# Altium PCB XPCAM_1V4.PCBDOC (part 1 of 2)
Units mil, origin at the board's own origin, x right, y up, seen from the top; angles counter-clockwise.
Board outline 2183.56 x 1446.93 mil, 6 copper layers (Top Layer, Mid-Layer 1, Mid-Layer 2, Mid-Layer 3, Mid-Layer 4, Bottom Layer); 49 components, 32 nets, 261 pads, 143 vias.
Unrouted connection lines stored in the file: 46.
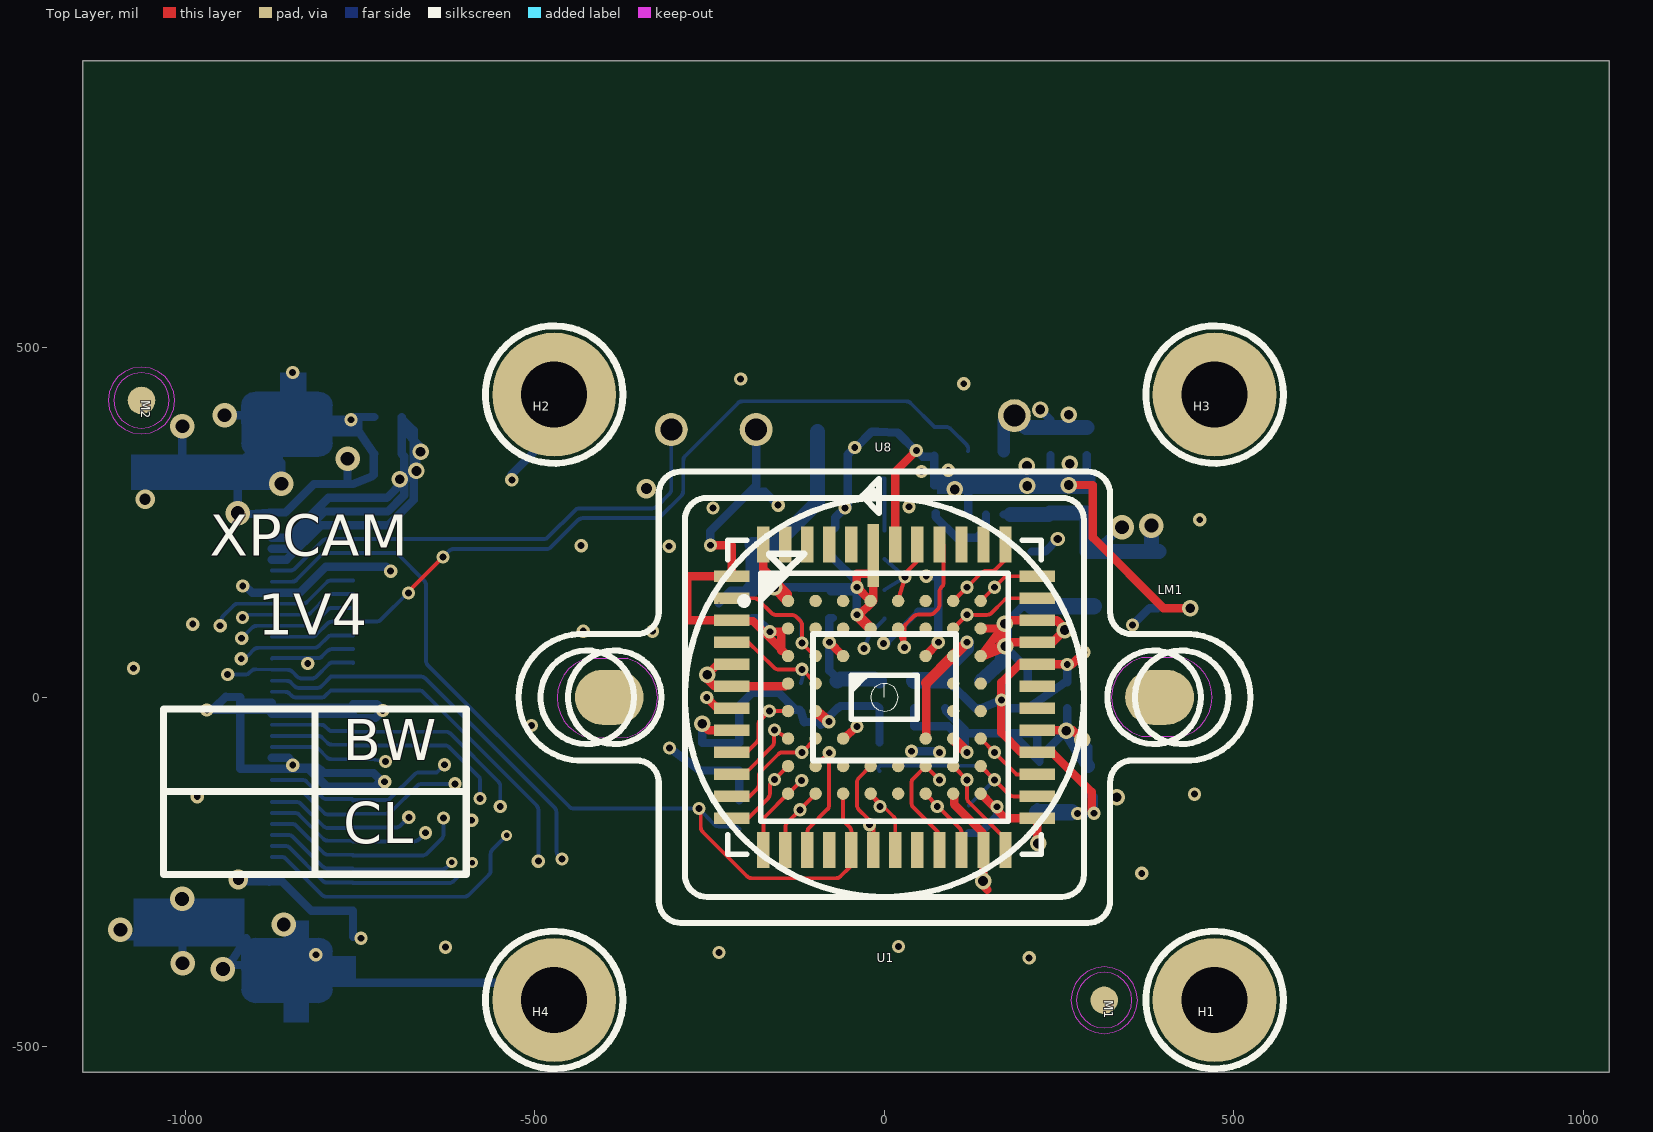
[diagram p0: Top Layer view]
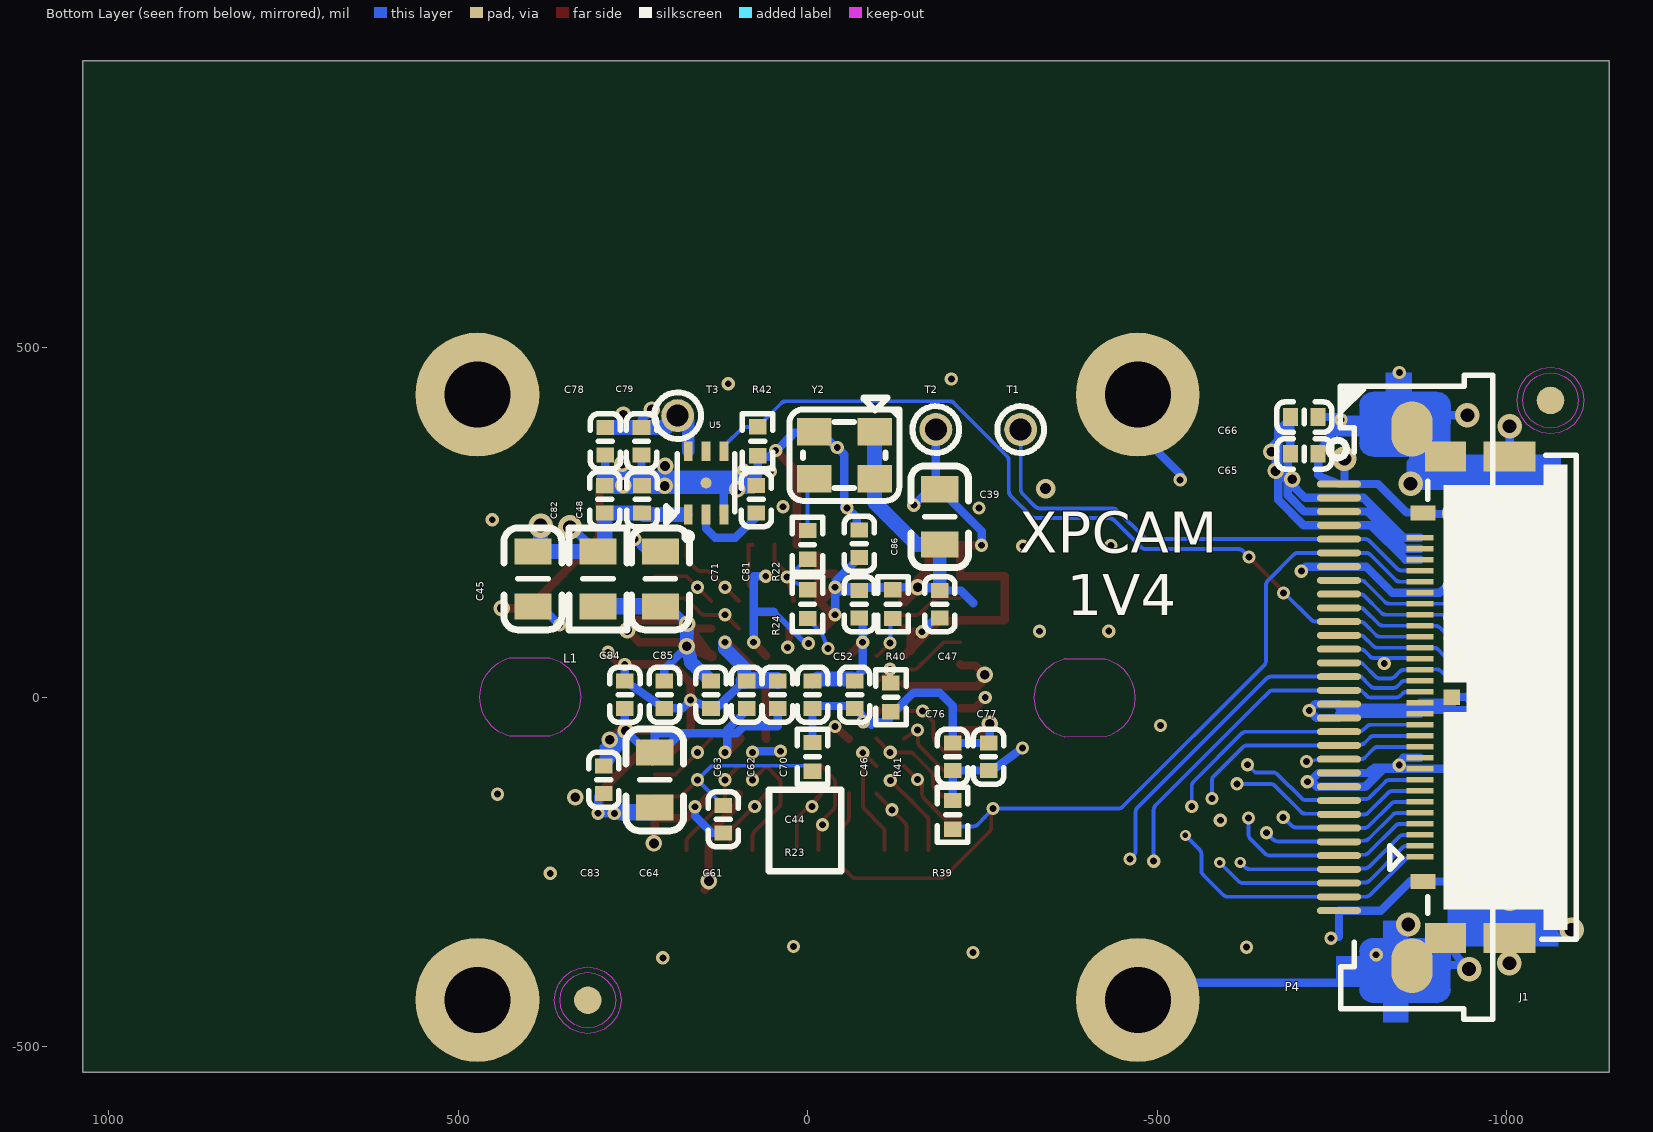
[diagram p1: Bottom Layer view, seen from below]
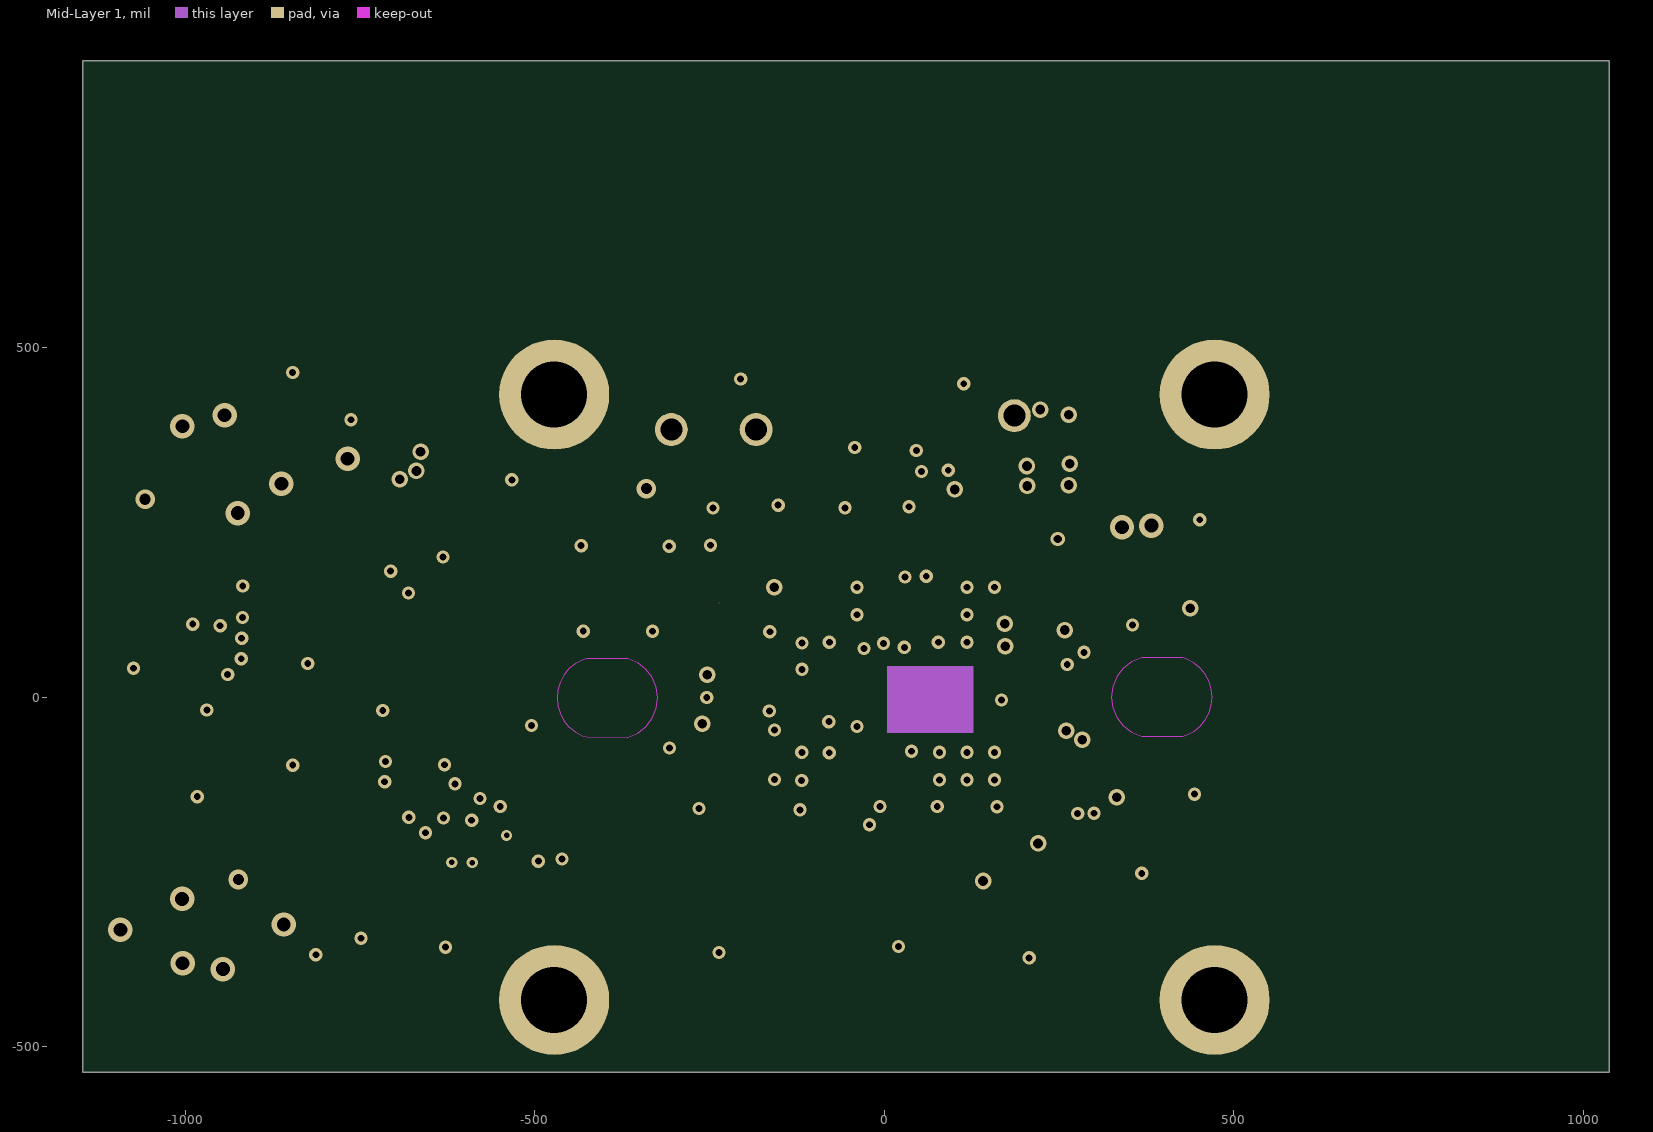
[diagram p2: Mid-Layer 1]
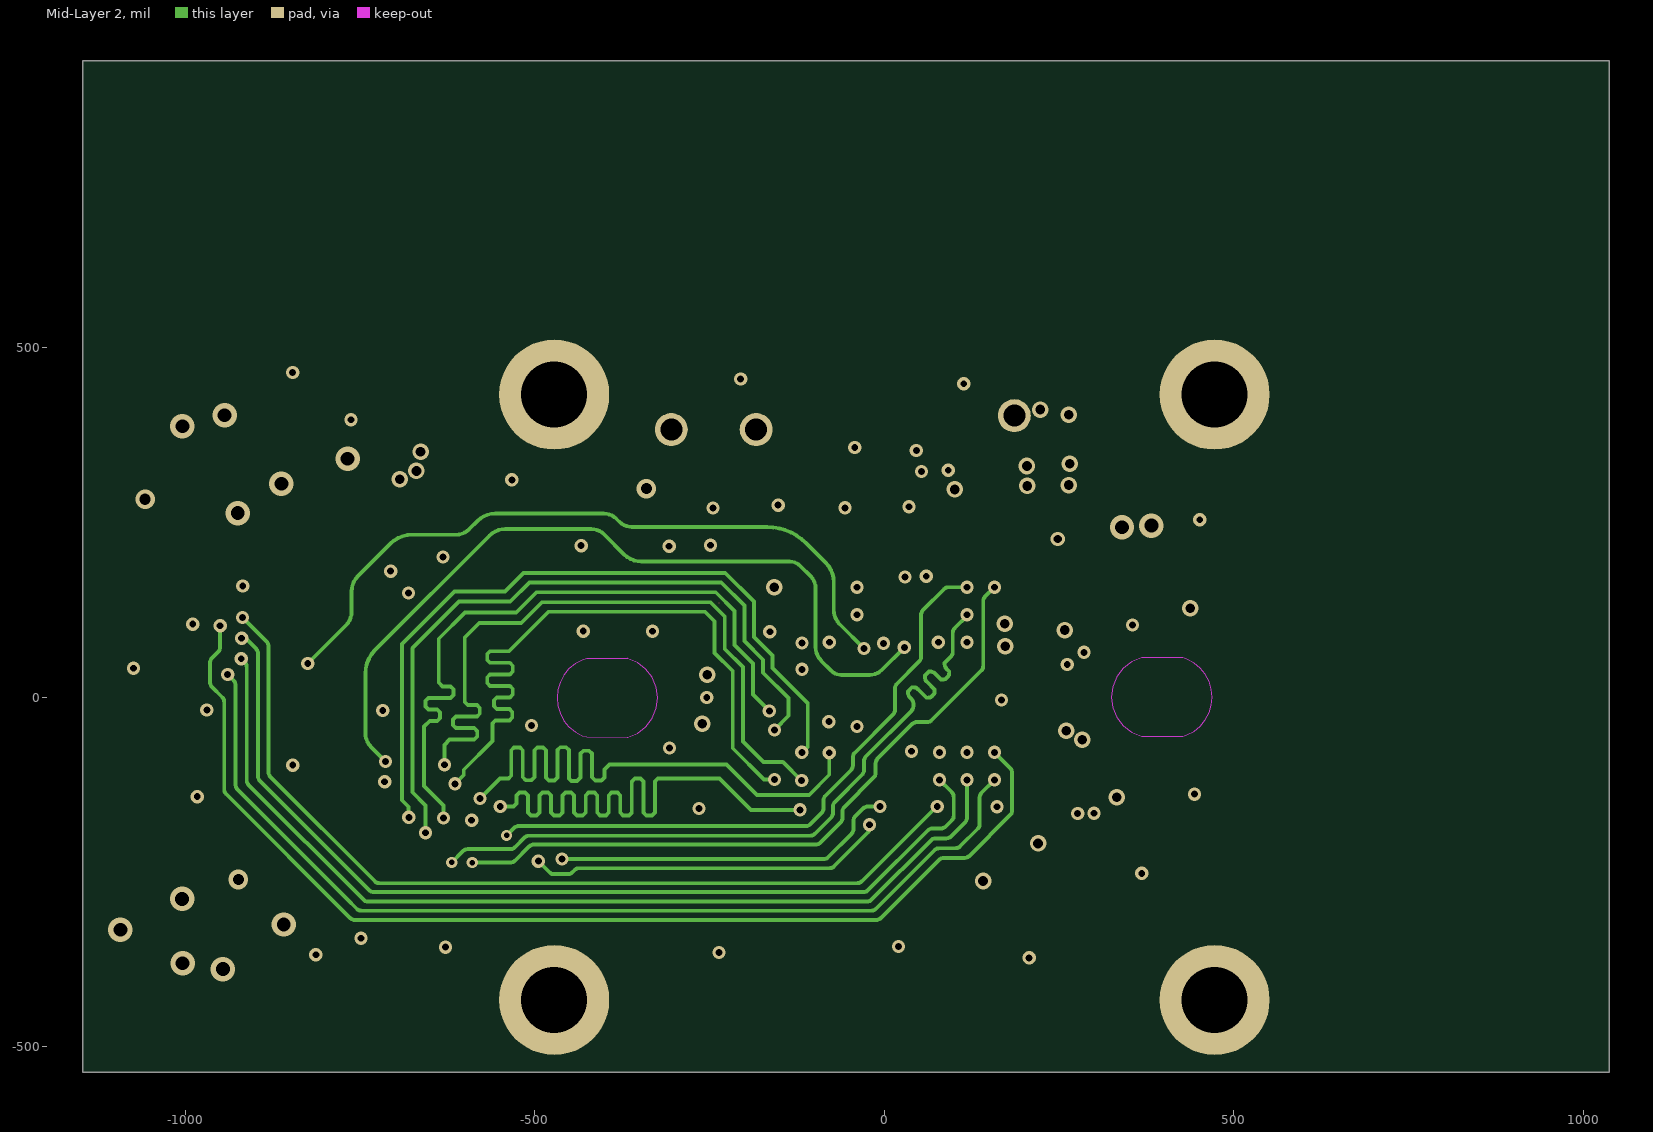
[diagram p3: Mid-Layer 2]
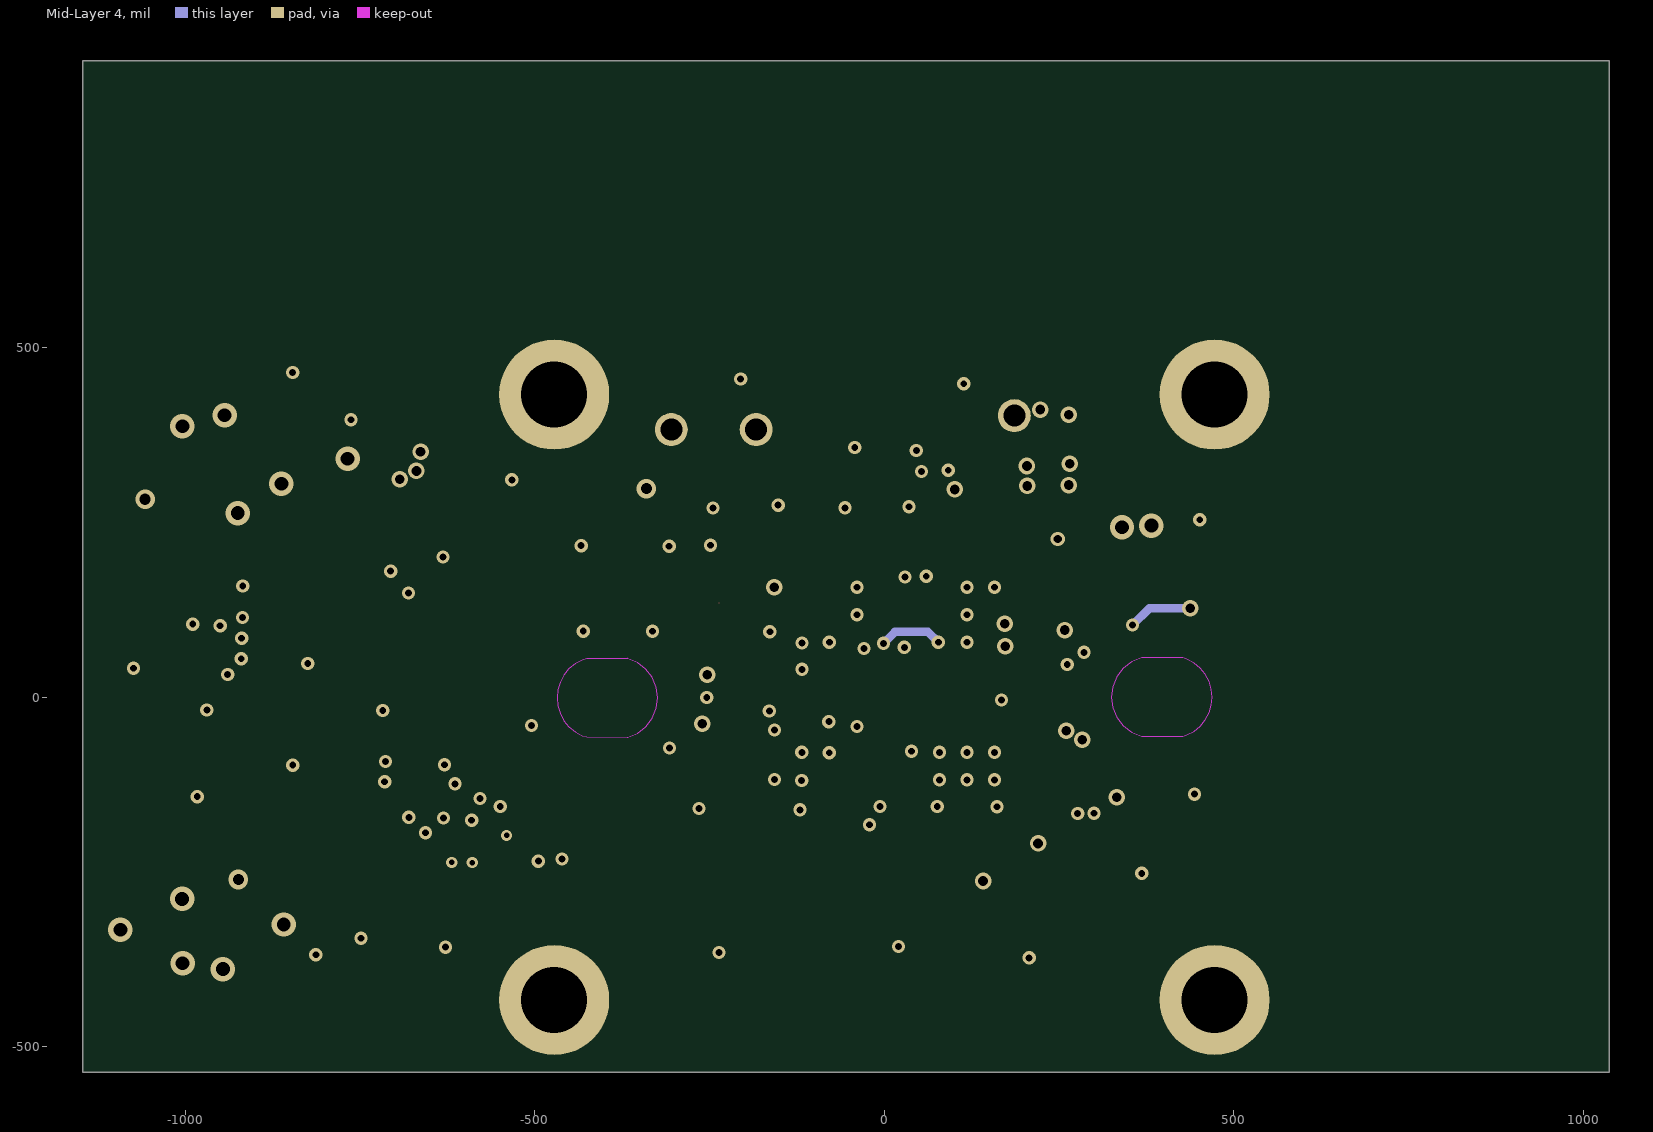
[diagram p4: Mid-Layer 4]

## Layer stack, top to bottom
Top Layer: signal copper 1.4
Dielectric: dielectric 12.6, FR-4, Dk 4.8
Mid-Layer 1: signal copper 1.4
Dielectric: dielectric 12.6, FR-4, Dk 4.8
Mid-Layer 2: signal copper 1.4
Dielectric: dielectric 12.6, FR-4, Dk 4.8
Mid-Layer 3: signal copper 1.4
Dielectric: dielectric 12.6, FR-4, Dk 4.8
Mid-Layer 4: signal copper 1.4
Dielectric: dielectric 12.6, FR-4, Dk 4.8
Bottom Layer: signal copper 1.4

## Board outline
-1146.73,-536.42 1036.82,-536.42 1036.82,910.52 -1146.73,910.52

## Design rules (kind name [scope] priority, off if disabled: settings)
Clearance [All] p1: gap=10
PlaneConnect "Power Plane Connect Style - pads with no thermal" [(Name='J1-31') Or (Name='J1-32') Or (Name='M1-1') Or (Name='M2-1')] p1: planeconnectstyle=NoConnect reliefexpansion=20 reliefentries=4 reliefconductorwidth=10 reliefairgap=10 // PAD - No Thermal Connect Rule
PlaneConnect "Power Plane Connect Style - from global settings" [All] p2: planeconnectstyle=Relief reliefexpansion=20 reliefentries=2 reliefconductorwidth=11.81 reliefairgap=10
PolygonConnect [All] p1: connectstyle=Relief reliefconductorwidth=10 reliefentries=4 polygonreliefangle="90 Angle"
RoutingVias [All] p1: holewidth=28 width=50 viastyle="Through Hole" minholewidth=28 minwidth=50 maxholewidth=28 maxwidth=50
SilkscreenOverComponentPads [All] p1: minsilkscreentomaskgap=10
SolderMaskExpansion "Solder Mask Expansion from CAM settings" [All] p1: expansion=2
Width [All] p1: maxlimit=10 minlimit=10 preferedwidth=10
26 further rules are at their usual default settings.

## Components (designator, comment, footprint, x,y, rotation, side; value= is the part's Value field where it differs from the comment)
C39 "10uF" 0805C -189.13,258.19 r270 bottom
C44 "4.7uF" 0402C_L -7.1,3.87 r270 bottom
C45 "10uF" 0805C 392.98,169.29 r90 bottom
C46 "0.1uF" 0402C_L -67.43,3.87 r270 bottom
C47 "0.1uF" 0402C_L -189.13,133.2 r90 bottom
C48 "0.1uF" 0402C_L 236.86,283.34 r270 bottom
C52 "4.7uF" 0402C_L -74,133.2 r90 bottom
C61 "0.1uF" 0402C_L 120.61,-174.53 r90 bottom
C62 "0.1uF" 0402C_L 87.28,3.82 r270 bottom
C63 "4.7uF" 0402C_L 138.12,3.82 r90 bottom
C64 "10uF" 0805C 218.76,-118.11 r90 bottom
C65 "4.7uF" 0402C_L -710.43,348.23 r0 bottom
C66 "0.1uF" 0402C_L -710.43,400.96 r0 bottom
C70 "4.7uF" 0402C_L 42.88,3.82 r270 bottom
C71 "10uF" 0805C 210.63,169.29 r270 bottom
C76 "4.7u" 0402C_L -207.5,-85.1 r270 bottom
C77 "0.1uF" 0402C_L -258.93,-85.1 r90 bottom
C78 "0.1uF" 0402C_L 289.43,366.31 r90 bottom
C79 "1uF" 0402C_L 237.68,366.31 r90 bottom
C81 "0.01uF" 0402C_L 73.34,283.34 r270 bottom
C82 "0.1uF" 0402C_L 290.26,283.34 r270 bottom
C83 "0.1uF" 0402C_L 291.49,-118.11 r90 bottom
C84 "0.01uF" 0402C_L 261.3,3.82 r270 bottom
C85 "1nF" 0402C_L 204.82,3.82 r90 bottom
C86 "0.1uF" 0402C_L -74,219.88 r270 bottom
H1 "CON1" PAD_M3_D350_450 472.44,-433.07 r0 top
H2 "CON1" PAD_M3_D350_450 -472.44,433.07 r0 top
H3 "CON1" PAD_M3_D350_450 472.44,433.07 r0 top
H4 "CON1" PAD_M3_D350_450 -472.44,-433.07 r0 top
J1 "20525-030E-02" HSA30_P40L196W42H10_20525 -939.38,0 r90 bottom
L1 "10uH" 0805R 299.83,169.29 r270 bottom
LM1 "CMT821_20" LEMS_P20_M12 0,0 r0 top
M1 "PAD_MARK_D1-2" PAD_MARK_D1-2 314.46,-433.37 r270 top
M2 "PAD_MARK_D1-2" PAD_MARK_D1-2 -1062.86,424.68 r270 top
P4 "Header_32" HS32A_FPC_P50L2350W480H210 -781.9,0 r90 bottom
R22 "0R" 0402R_L 0,218.21 r90 bottom
R23 "10K" 0402R_L -7.1,-85.1 r90 bottom
R24 "22R" 0402R_L 0,133.2 r270 bottom
R39 "10K" 0402R_L -207.5,-168.1 r90 bottom
R40 "10K" 0402R_L -122.1,133.2 r90 bottom
R41 "10K" 0402R_L -119.23,0.05 r270 bottom
R42 "10K" 0402R_L 71.48,366.31 r90 bottom
T1 "CON1" PAD_TP_D1.2 -304.94,383.03 r180 bottom
T2 "PAD_TP_D1.2" PAD_TP_D1.2 -183.44,383.03 r180 bottom
T3 "PAD_TP_D1.2" PAD_TP_D1.2 185.85,402.95 r180 bottom
U1 "MT9V024IA7XTM" IBGA52_8X8_P100L90W90H90R 0,0 r0 top
U5 "TPS73533" SON6_P65L21W21H8_DRV 145.26,306.77 r90 bottom
U8 "CLCC48_P80L114W114H23" CLCC48_P80L114W114H23 0,0 r0 top
Y2 "HSO531S_3225" XTAL_3225 -52.57,346.46 r0 bottom

## Footprints (in the part's own frame and the unit in brackets; to place one, negate y for a bottom-side part, rotate by r counter-clockwise, add the part's x,y. Pads: shape width x height; smd on the part's side, far side on the other; paste and mask are expansions set on the pad)
0402C_L [mm]
  rect 0.54x0.64 smd: 1(-0.5,0) 2(0.5,0)
  silkscreen extent -1,-0.55 1,0.55
0402R_L [mm]
  rect 0.56x0.64 smd: 1(-0.52,0) 2(0.52,0)
  silkscreen extent -1,-0.55 1,0.55
0805C [mm]
  rect 0.95x1.35 smd: 1(-1,0) 2(1,0)
  silkscreen extent -1.85,-1.05 1.85,1.05
0805R [mm]
  rect 0.95x1.35 smd: 1(-1,0) 2(1,0)
  silkscreen extent -1.85,-1.05 1.85,1.05
CLCC48_P80L114W114H23 [mm]
  rect 0.42x2.3 smd: 1(-0.4,5.15)
  rect 0.45x1.3 smd paste-0.015: 2(-1.2,5.55) 3(-2,5.55) 4(-2.8,5.55) 5(-3.6,5.55) 6(-4.4,5.55) 19(-4.4,-5.55) 20(-3.6,-5.55) 21(-2.8,-5.55) 22(-2,-5.55) 23(-1.2,-5.55) 24(-0.4,-5.55) 25(0.4,-5.55) 26(1.2,-5.55) 27(2,-5.55) 28(2.8,-5.55) 29(3.6,-5.55) 30(4.4,-5.55) 43(4.4,5.55) 44(3.6,5.55) 45(2.8,5.55) 46(2,5.55) 47(1.2,5.55) 48(0.4,5.55)
  rect 1.3x0.42 smd: 7(-5.55,4.4) 8(-5.55,3.6) 9(-5.55,2.8) 10(-5.55,2) 11(-5.55,1.2) 12(-5.55,0.4) 13(-5.55,-0.4) 14(-5.55,-1.2) 15(-5.55,-2) 16(-5.55,-2.8) 17(-5.55,-3.6) 18(-5.55,-4.4) 31(5.55,-4.4) 32(5.55,-3.6) 33(5.55,-2.8) 34(5.55,-2) 35(5.55,-1.2) 36(5.55,-0.4) 37(5.55,0.4) 38(5.55,1.2) 39(5.55,2) 40(5.55,2.8) 41(5.55,3.6) 42(5.55,4.4)
  silkscreen extent -5.7,-5.7 5.7,7.92
HS32A_FPC_P50L2350W480H210 [mm]
  oval 0.254x1.6 smd: 1(7.75,0.55) 2(7.25,0.55) 3(6.75,0.55) 4(6.25,0.55) 5(5.75,0.55) 6(5.25,0.55) 7(4.75,0.55) 8(4.25,0.55) 9(3.75,0.55) 10(3.25,0.55) 11(2.75,0.55) 12(2.25,0.55) 13(1.75,0.55) 14(1.25,0.55) 15(0.75,0.55) 16(0.25,0.55) 17(-0.25,0.55) 18(-0.75,0.55) 19(-1.25,0.55) 20(-1.75,0.55) 21(-2.25,0.55) 22(-2.75,0.55) 23(-3.25,0.55) 24(-3.75,0.55) 25(-4.25,0.55) 26(-4.75,0.55) 27(-5.25,0.55) 28(-5.75,0.55) 29(-6.25,0.55) 30(-6.75,0.55) 31(-7.25,0.55) 32(-7.75,0.55)
  oval 2x1.5 smd: 33(9.75,-2.1) 34(-9.75,-2.1)
  Top Layer region: 9.25,-0.19 9.055,-0.229 8.89,-0.34 8.779,-0.505 8.74,-0.7 8.75,-0.7 8.74,-3 8.779,-3.195 8.89,-3.36 9.055,-3.471 9.25,-3.51 9.25,-3.5 10.6,-3.51 10.795,-3.471 10.96,-3.36 11.071,-3.195 11.11,-3 11.1,-3 11.11,-0.7 11.071,-0.505 10.96,-0.34 10.795,-0.229 10.6,-0.19 10.6,-0.2 9.25,-0.2
  Top Layer region: -10.6,-0.19 -10.795,-0.229 -10.96,-0.34 -11.071,-0.505 -11.11,-0.7 -11.1,-0.7 -11.11,-3 -11.071,-3.195 -10.96,-3.36 -10.795,-3.471 -10.6,-3.51 -10.6,-3.5 -9.25,-3.51 -9.055,-3.471 -8.89,-3.36 -8.779,-3.195 -8.74,-3 -8.75,-3 -8.74,-0.7 -8.779,-0.505 -8.89,-0.34 -9.055,-0.229 -9.25,-0.19 -9.25,-0.2 -10.6,-0.2
  silkscreen extent -11.7,-5.04 11.7,0.92
HSA30_P40L196W42H10_20525 [mm]
  rect 0.2x0.98 smd: 1(-5.8,1.6) 2(-5.4,1.6) 3(-5,1.6) 4(-4.6,1.6) 5(-4.2,1.6) 6(-3.8,1.6) 7(-3.4,1.6) 8(-3,1.6) 9(-2.6,1.6) 10(-2.2,1.6) 11(-1.8,1.6) 12(-1.4,1.6) 13(-1,1.6) 14(-0.6,1.6) 15(-0.2,1.6) 16(0.2,1.6) 17(0.6,1.6) 18(1,1.6) 19(1.4,1.6) 20(1.8,1.6) 21(2.2,1.6) 22(2.6,1.6) 23(3,1.6) 24(3.4,1.6) 25(3.8,1.6) 26(4.2,1.6) 27(4.6,1.6) 28(5,1.6) 29(5.4,1.6) 30(5.8,1.6)
  round 0 all layers, no hole: 31(-7.45,0) 32(7.45,0)
  rect 1.1x1.5 smd: 33(-8.75,0.68) 34(8.75,0.68)
  rect 1.1x1.9 smd: 35(8.75,-1.65) 36(-8.75,-1.65)
  rect 0.55x0.9 smd: 37(-6.7,1.5) 38(6.7,1.5)
  rect 0.55x0.6 smd: 39(0,0.45)
  silkscreen extent -8.8,-4.07 8.8,2.7
IBGA52_8X8_P100L90W90H90R [mm]
  round 0.45 smd: A1(-3.5,3.5) A2(-2.5,3.5) A3(-1.5,3.5) A4(-0.5,3.5) A5(0.5,3.5) A6(1.5,3.5) A7(2.5,3.5) A8(3.5,3.5) B1(-3.5,2.5) B2(-2.5,2.5) B3(-1.5,2.5) B4(-0.5,2.5) B5(0.5,2.5) B6(1.5,2.5) B7(2.5,2.5) B8(3.5,2.5) C1(-3.5,1.5) C2(-2.5,1.5) C3(-1.5,1.5) C6(1.5,1.5) C7(2.5,1.5) C8(3.5,1.5) D1(-3.5,0.5) D2(-2.5,0.5) D7(2.5,0.5) D8(3.5,0.5) E1(-3.5,-0.5) E2(-2.5,-0.5) E7(2.5,-0.5) E8(3.5,-0.5) F1(-3.5,-1.5) F2(-2.5,-1.5) F3(-1.5,-1.5) F6(1.5,-1.5) F7(2.5,-1.5) F8(3.5,-1.5) G1(-3.5,-2.5) G2(-2.5,-2.5) G3(-1.5,-2.5) G4(-0.5,-2.5) G5(0.5,-2.5) G6(1.5,-2.5) G7(2.5,-2.5) G8(3.5,-2.5) H1(-3.5,-3.5) H2(-2.5,-3.5) H3(-1.5,-3.5) H4(-0.5,-3.5) H5(0.5,-3.5) H6(1.5,-3.5) H7(2.5,-3.5) H8(3.5,-3.5)
  silkscreen extent -5.22,-4.5 4.5,4.5
LEMS_P20_M12 [mm]
  oval 2.5x2 smd: 1(-10,0) 2(10,0)
  silkscreen extent -13.3,-8.2 13.3,8.2
PAD_M3_D350_450 [mm]
  round 4.5 / inner round 4 / far side round 4.5 hole 2.4 unplated: 1(0,0)
  silkscreen extent -2.5,-2.5 2.5,2.5
PAD_MARK_D1-2 [mm]
  round 1 / inner round 0 / far side round 1 all layers, no hole mask+0.5: 1(0,0)
  Top Layer keep-out region: 1.009,0 0.974,0.261 0.873,0.504 0.713,0.713 0.504,0.873 0.261,0.974 0,1.009 -0.261,0.974 -0.504,0.873 -0.713,0.713 -0.873,0.504 -0.974,0.261 -1.009,0 -0.974,-0.261 -0.873,-0.504 -0.713,-0.713 -0.504,-0.873 -0.261,-0.974 0,-1.009 0.261,-0.974 0.504,-0.873 0.713,-0.713 0.873,-0.504 0.974,-0.261 1.009,0
  Top Layer keep-out region: 1.21,0 1.169,0.313 1.048,0.605 0.856,0.856 0.605,1.048 0.313,1.169 0,1.21 -0.313,1.169 -0.605,1.048 -0.856,0.856 -1.048,0.605 -1.169,0.313 -1.21,0 -1.169,-0.313 -1.048,-0.605 -0.856,-0.856 -0.605,-1.048 -0.313,-1.169 0,-1.21 0.313,-1.169 0.605,-1.048 0.856,-0.856 1.048,-0.605 1.169,-0.313 1.21,0
  Bottom Layer keep-out region: 1.009,0 0.974,0.261 0.873,0.504 0.713,0.713 0.504,0.873 0.261,0.974 0,1.009 -0.261,0.974 -0.504,0.873 -0.713,0.713 -0.873,0.504 -0.974,0.261 -1.009,0 -0.974,-0.261 -0.873,-0.504 -0.713,-0.713 -0.504,-0.873 -0.261,-0.974 0,-1.009 0.261,-0.974 0.504,-0.873 0.713,-0.713 0.873,-0.504 0.974,-0.261 1.009,0
  Bottom Layer keep-out region: 1.21,0 1.169,0.313 1.048,0.605 0.856,0.856 0.605,1.048 0.313,1.169 0,1.21 -0.313,1.169 -0.605,1.048 -0.856,0.856 -1.048,0.605 -1.169,0.313 -1.21,0 -1.169,-0.313 -1.048,-0.605 -0.856,-0.856 -0.605,-1.048 -0.313,-1.169 0,-1.21 0.313,-1.169 0.605,-1.048 0.856,-0.856 1.048,-0.605 1.169,-0.313 1.21,0
PAD_TP_D1.2 [mm]
  round 1.2 hole 0.8: 1(0,0)
  silkscreen extent -0.85,-0.85 0.85,0.85
SON6_P65L21W21H8_DRV [mm]
  rect 0.72x0.32 smd: 1(-1.15,0.65) 2(-1.15,0) 3(-1.15,-0.65) 4(1.15,-0.65) 5(1.15,0) 6(1.15,0.65)
  round 0.4 smd: 7(0,0)
  Top Layer region: -0.4,0.6 -0.2,0.8 0.2,0.804 0.278,0.788 0.344,0.744 0.388,0.678 0.404,0.6 0.4,0.6 0.404,-0.6 0.388,-0.678 0.344,-0.744 0.278,-0.788 0.2,-0.804 0.2,-0.8 -0.2,-0.804 -0.278,-0.788 -0.344,-0.744 -0.388,-0.678 -0.404,-0.6 -0.4,-0.6 -0.4,0.6
  silkscreen extent -2.07,-1.05 1.05,1.45
XTAL_3225 [mm]
  rect 1.25x1 smd: 1(-1.1,-0.85) 2(1.1,-0.85) 3(1.1,0.85) 4(-1.1,0.85)
  silkscreen extent -2,-2.08 2,1.66

## Via types
v1: diameter 19, hole 9.84, Top Layer to Bottom Layer, 101 vias
v2: diameter 23.62, hole 13.78, Top Layer to Bottom Layer, 22 vias
v3: diameter 35, hole 19.68, Top Layer to Bottom Layer, 12 vias
v4: diameter 16, hole 7.87, Top Layer to Bottom Layer, 3 vias
v5: diameter 27.95, hole 15.75, Top Layer to Bottom Layer, 3 vias
v6: diameter 20.47, hole 11.81, Top Layer to Bottom Layer, 1 vias
v7: diameter 0, hole 0, Top Layer to Bottom Layer, 1 vias

## Nets (pads, with @x,y where several pads share a name; then routed paths per layer and width w, separated by ;. In a path a pad name is that pad's centre, name@x,y a point inside that pad or via, vN(x,y) a via of type N, cw(c..) or ccw(c..) an arc to the next point about the centre after c; other vN are vias at no path point)
5V0: C65.2 C66.2 C78.2 C79.2 J1.28 J1.29 J1.30 P4.2 P4.3 P4.4 T3.1 U5.6 | length 1264.6
  Bottom Layer w12: J1.28@-876.39,196.85 -855.27,196.85 -806.05,246.07 P4.4@-760.25,246.07 -709.89,246.07 -673.61,282.34 -673.61,381.99 -690.74,399.13 C66.2@-690.74,400.96 ; J1.29@-876.39,212.6 -854.22,212.6 -801.07,265.75 P4.3@-760.25,265.75 -710.42,265.75 -686.98,289.19 -686.98,344.76 -688.97,346.75 -689.26,346.75 C65.2@-690.74,348.23 C66.2@-690.74,400.96 ; J1.30@-876.39,228.35 -852.81,228.35 -795.72,285.44 P4.2@-760.25,285.44 ; v2(222.86,411.68) 237.68,396.87 C79.2@237.68,386 ; P4.2@-760.25,285.44 -762.03,285.59 -766.53,285.59 -766.37,285.44 P4.2@-760.25,285.44 ; P4.2@-760.25,285.44 -711.73,285.44 -690.97,306.19 -690.97,309.62 v2(-693.46,312.11) -683.76,312.48 -666.72,323.79 v2(-669.49,323.79) -669.49,350.02 v2(-663.65,351.17) -663.65,358.36 -690.74,386.01 C66.2@-690.74,400.96
  Bottom Layer w17.72: U5.6@170.85,352.04 170.85,395.85 T3.1@185.85,402.95
  Bottom Layer w21.65: T3.1@185.85,402.95 202.8,386 C79.2@237.68,386 C78.2@289.43,386
  other v2: 263.77,404.22
ADDR_CTL: J1.20 P4.12 U1.G7 U8.30 | length 1707.5
  Top Layer w5.5: v1(118.11,-118.11) 118.11,-143.32 ccw(c127.74,-143.32) 120.93,-150.13 170.41,-199.61 cw(c163.6,-206.41) 173.23,-206.41 U8.30@173.23,-218.5
  Top Layer w6: U1.G7@98.43,-98.43 v1(118.11,-118.11)
  Mid-Layer 2 w5.5: v1(-920.23,55.22) -915.18,50.17 cw(c-921.98,43.36) -912.36,43.36 -912.36,-118.54 ccw(c-902.73,-118.54) -909.54,-125.34 -745.38,-289.5 ccw(c-738.58,-282.69) -738.58,-292.32 -25.19,-292.32 ccw(c-25.19,-282.69) -18.38,-289.5 66.48,-204.63 cw(c73.29,-211.44) 73.29,-201.82 88.46,-201.82 ccw(c88.46,-192.19) 95.27,-199 115.29,-178.97 ccw(c108.49,-172.17) 118.11,-172.17 v1(118.11,-118.11)
  Bottom Layer w5.5: v1(-920.23,55.22) -918.95,55.22 ccw(c-918.95,64.84) -912.06,58.13 -909.27,60.98 -902.46,67.97 cw(c-895.57,61.24) -895.57,70.87 J1.20@-876.39,70.87 -815.83,70.87 ccw(c-815.83,80.49) -809.02,73.69 -796.95,85.76 cw(c-790.14,78.95) -790.14,88.58 P4.12@-760.25,88.58
AGND: C62.1 C63.1 C64.1 C70.1 C71.1 C83.1 C84.1 C85.1 U1.C7 U1.F6 U8.34 U8.38 | length 1127.2
  Top Layer w12: U1.F6@59.06,-59.06 59.87,-58.24 59.87,20.5 ; v1(261.62,46.92) v1@261.3,47.24 ; v1(285.43,64.28) 268.4,47.24 v1@261.3,47.24 ; v1(299.77,-165.91) 296.44,-162.58 296.44,-135.25 239.93,-78.74 U8.34@218.5,-78.74 195.5,-78.74 167.36,-50.6 v1(167.36,-3.88) 167.36,21.48 194.47,48.58 217.17,48.58 U8.38@218.5,47.24 v1@261.3,47.24
  Top Layer w15.75: 59.87,20.5 U1.C7@98.43,59.06 v1(118.11,78.74)
  Bottom Layer w12: v1(38.75,-77.14) 77.14,-77.14 v1(78.74,-78.74) ; C62.1@87.28,23.51 87.39,23.4 91.06,23.4 130.12,-15.66 130.12,-15.86 C63.1@138.12,-15.86 v1(167.36,-3.88) 179.22,-15.73 204.69,-15.73 C85.1@204.82,-15.86 C84.1@261.3,23.51 261.62,21.81 v1(261.62,46.92) ; C71.1@210.63,208.66 230.28,208.66 v6(247.83,226.34) ; C64.1@218.76,-164.63 C64.1@218.76,-157.48 ; v1@267.68,-164.63 v1(276.44,-166.24) 276.44,-165.91 v1(299.77,-165.91) 299.77,-142.29 C83.1@291.49,-137.8
  Bottom Layer w19.68: C62.1@91.06,23.4 91.06,42.75 118.11,69.8 v1(118.11,78.74)
  Bottom Layer w23.62: C70.1@42.88,23.51 43.72,24.34 90.12,24.34 C62.1@91.06,23.4 ; C64.1@218.76,-164.63 v1@267.68,-164.63
  other v2: 332.26,-142.97
CAM_SCL: J1.17 P4.15 U1.H4 U8.25 | length 1182.7
  Top Layer w5.5: v1(-6.33,-156.31) U1.H4@-19.69,-137.8 12.72,-170.2 cw(c5.91,-177.01) 15.54,-177.01 15.54,-218.29 U8.25@15.75,-218.5
  Mid-Layer 2 w5.5: v1(-461.41,-231.43) -87.13,-231.43 ccw(c-87.13,-221.8) -80.32,-228.61 -47.15,-195.44 ccw(c-53.96,-188.63) -44.33,-188.63 -44.33,-176.85 cw(c-34.71,-176.85) -41.51,-170.05 -30.59,-159.13 cw(c-23.79,-165.93) -23.79,-156.31 v1(-6.33,-156.31)
  Bottom Layer w5.5: J1.17@-876.39,23.62 -855.52,23.62 cw(c-855.52,14) -848.72,20.8 -843.82,15.91 ccw(c-837.01,22.71) -837.01,13.09 -812.23,13.09 ccw(c-812.23,22.71) -805.43,15.91 -791.8,29.53 -790.84,29.53 P4.15@-760.25,29.53 -663.2,29.53 cw(c-663.2,19.9) -656.39,26.71 -472.13,-157.56 cw(c-478.93,-164.36) -469.31,-164.36 -469.31,-219.55 ccw(c-459.68,-219.55) -466.49,-226.35 v1(-461.41,-231.43)
CAM_SDA: J1.16 P4.16 U1.G4 U8.24 | length 1208.8
  Top Layer w5.5: U1.G4@-19.69,-98.43 -36.42,-115.16 ; U8.24@-15.75,-218.5 -15.75,-183.49 -20.78,-182.47 -20.87,-182.38 v1(-21.19,-182.38) -21.62,-181.96 v1@-21.62,-179.79 ; -39.24,-154.2 ccw(c-29.61,-154.2) -36.42,-161 ; -39.24,-154.2 ccw(c-29.61,-154.2) -36.42,-161 ; -39.24,-154.2 -39.24,-121.96 ; -39.24,-121.96 cw(c-29.61,-121.96) -36.42,-115.16 ; -39.24,-121.96 cw(c-29.61,-121.96) -36.42,-115.16 ; -36.42,-161 -24.43,-172.98 ; -24.43,-172.98 cw(c-31.24,-179.79) v1@-21.62,-179.79 ; -24.43,-172.98 cw(c-31.24,-179.79) v1@-21.62,-179.79
  Mid-Layer 2 w5.5: v1(-495.05,-234.46) -479.31,-250.2 ccw(c-472.5,-243.4) -472.5,-253.02 -453.09,-253.02 ccw(c-453.09,-243.4) -446.28,-250.2 -443.44,-247.37 cw(c-436.64,-254.17) -436.64,-244.55 -78.72,-244.55 ccw(c-78.72,-234.92) -71.92,-241.73 -24.01,-193.82 ; -24.01,-193.82 ccw(c-30.82,-187.02) -21.19,-187.02 v1(-21.19,-182.38)
  Bottom Layer w5.5: J1.16@-876.39,7.87 -857.67,7.87 cw(c-857.67,-1.75) -850.87,5.06 -848.2,2.38 ccw(c-841.39,9.19) -841.39,-0.43 -806.31,-0.43 ccw(c-806.31,9.19) -799.51,2.38 -792.05,9.84 P4.16@-760.25,9.84 -666.02,9.84 cw(c-666.02,0.21) -659.21,7.02 -643.24,-8.95 -497.84,-154.36 cw(c-504.68,-161.13) -495.05,-161.13 v1(-495.05,-234.46)
CAMPWR_EN: J1.21 P4.11 R42.2 U5.4 | length 1195.7
  Top Layer w5.5: v1(-680.85,149.37) -680.85,151.47 v1(-631.56,200.76)
  Bottom Layer w5.5: J1.21@-876.39,86.61 -819.61,86.61 ccw(c-819.61,96.24) -812.81,89.43 -796.79,105.45 cw(c-789.98,98.65) -789.98,108.27 P4.11@-760.25,108.27 -727.09,108.27 ccw(c-727.09,117.89) -720.28,111.09 -682,149.37 v1(-680.85,149.37) ; v1(-631.56,200.76) -623.05,209.27 cw(c-616.24,202.47) -616.24,212.09 -483.57,212.09 ccw(c-483.57,221.72) -476.76,214.91 -438.15,253.53 cw(c-431.34,246.72) -431.34,256.35 -326.51,256.35 ccw(c-326.51,265.97) -319.7,259.16 -290.62,288.25 ccw(c-297.42,295.05) -287.8,295.05 -287.8,338.56 cw(c-278.17,338.56) -284.98,345.37 -209.66,420.68 cw(c-202.86,413.88) -202.86,423.5 30.78,423.5 cw(c30.78,413.88) 37.58,420.68 R42.2@71.48,386.79 88.06,386.79 cw(c88.06,377.16) 94.86,383.97 117.22,361.61 cw(c110.42,354.8) 120.04,354.8 120.04,352.41 U5.4@119.67,352.04
CMOS_D0: J1.1 P4.31 U1.A7 U8.43 | length 1417.6
  Top Layer w5.5: v1(118.11,157.48) 138.48,177.85 cw(c145.29,171.05) 145.29,180.67 152.76,180.67 ccw(c152.76,190.3) 159.56,183.49 170.41,194.34 ccw(c163.6,201.14) 173.23,201.14 U8.43@173.23,218.5
  Top Layer w6: U1.A7@98.43,137.8 v1(118.11,157.48)
  Mid-Layer 2 w5.5: v4(-540.57,-197.69) -529.87,-186.98 cw(c-523.07,-193.79) -523.07,-184.17 -112.44,-184.17 ccw(c-112.44,-174.54) -105.63,-181.35 -90.05,-165.77 ccw(c-96.85,-158.96) -87.23,-158.96 -87.23,-147.61 cw(c-77.6,-147.61) -84.41,-140.81 -47.94,-104.34 ccw(c-54.75,-97.53) -45.12,-97.53 -45.12,-86.14 cw(c-35.5,-86.14) -42.3,-79.34 12.25,-24.78 ccw(c5.44,-17.98) 15.07,-17.98 15.07,12.59 cw(c24.69,12.59) 17.89,19.4 49.55,51.06 ccw(c42.75,57.87) 52.37,57.87 52.37,117.87 cw(c62,117.87) 55.19,124.67 85.18,154.66 cw(c91.99,147.86) 91.99,157.48 v1(118.11,157.48)
  Bottom Layer w5.5: J1.1@-876.39,-228.35 -862.85,-228.35 cw(c-862.85,-237.97) -856.05,-231.17 -804.6,-282.62 ccw(c-797.79,-275.81) -797.79,-285.44 P4.31@-760.25,-285.44 -601.42,-285.44 ccw(c-601.42,-275.81) -594.62,-282.62 -566.15,-254.15 ccw(c-572.95,-247.34) -563.33,-247.34 -563.33,-224.43 cw(c-553.7,-224.43) -560.51,-217.62 v4(-540.57,-197.69)
CMOS_D1: J1.2 P4.30 U1.A8 U8.42 | length 1402.1
  Top Layer w5.5: U1.A8@137.8,137.8 v1(157.48,157.48) 173.23,173.23 U8.42@218.5,173.23
  Mid-Layer 2 w5.5: v4(-589.68,-236.56) -535.37,-236.56 ccw(c-535.37,-226.94) -528.57,-233.74 -508.34,-213.52 cw(c-501.53,-220.32) -501.53,-210.7 -98.32,-210.7 ccw(c-98.32,-201.07) -91.51,-207.88 -62.87,-179.24 ccw(c-69.67,-172.43) -60.05,-172.43 -60.05,-163.59 cw(c-50.42,-163.59) -57.23,-156.78 -15.43,-114.98 ccw(c-22.24,-108.18) -12.61,-108.18 -12.61,-94.57 cw(c-2.99,-94.57) -9.8,-87.77 39.71,-38.26 cw(c46.52,-45.06) 46.52,-35.44 60.98,-35.44 ccw(c60.98,-25.81) 67.79,-32.62 138.49,38.09 ccw(c131.69,44.89) 141.31,44.89 141.31,137.33 cw(c150.94,137.33) 144.13,144.13 v1(157.48,157.48)
  Bottom Layer w5.5: J1.2@-876.39,-212.6 -857.45,-212.6 cw(c-857.45,-222.22) -850.64,-215.42 -803.68,-262.38 ccw(c-796.87,-255.57) -796.87,-265.2 -760.8,-265.2 P4.30@-760.25,-265.75 -622.85,-265.75 ccw(c-622.85,-256.13) -616.04,-262.93 v4(-589.68,-236.56)
CMOS_D2: J1.3 P4.29 U1.B7 U8.41 | length 1439.6
  Top Layer w5.5: v1(118.11,118.11) 130.24,118.11 130.47,117.88 146.52,117.88 ccw(c146.52,127.51) 153.32,120.7 171.54,138.91 cw(c178.34,132.11) 178.34,141.73 U8.41@218.5,141.73
  Top Layer w6: U1.B7@98.43,98.43 v1(118.11,118.11)
  Mid-Layer 2 w5.5: v4(-619.03,-236.18) -602.93,-220.08 cw(c-596.13,-226.89) -596.13,-217.26 -535.37,-217.26 ccw(c-535.37,-207.64) -528.57,-214.44 -514.9,-200.78 cw(c-508.1,-207.58) -508.1,-197.96 -106.12,-197.96 ccw(c-106.12,-188.34) -99.32,-195.14 -76.42,-172.24 ccw(c-83.22,-165.43) -73.6,-165.43 -73.6,-156.4 cw(c-63.97,-156.4) -70.78,-149.6 -31.97,-110.79 ccw(c-38.78,-103.98) -29.15,-103.98 -29.15,-91.11 cw(c-19.53,-91.11) -26.33,-84.31 38.59,-19.39 ccw(c31.78,-12.58) 41.4,-12.58 41.4,-9.08 ccw(c31.78,-9.08) 38.59,-2.27 36.49,-0.17 cw(c43.29,6.63) 33.67,6.63 33.67,8.48 39.5,14.31 41.35,14.31 cw(c41.35,4.69) 48.15,11.5 60.23,-0.58 62.08,-0.58 ccw(c62.08,9.04) 68.89,2.24 69.08,2.43 ccw(c62.28,9.24) 71.9,9.24 71.9,11.08 60.67,22.31 cw(c67.48,29.12) 57.86,29.12 57.85,30.96 63.69,36.8 65.54,36.8 cw(c65.54,27.17) 72.34,33.98 81.01,25.31 82.86,25.31 ccw(c82.86,34.93) 89.66,28.13 89.86,28.32 ccw(c83.05,35.13) 92.68,35.13 92.68,36.97 88.98,40.68 cw(c95.78,47.48) 86.16,47.48 86.16,49.33 95.05,58.22 ccw(c88.25,65.03) 97.87,65.03 97.87,92.3 cw(c107.5,92.3) 100.69,99.11 118.11,116.53 v1(118.11,118.11)
  Bottom Layer w5.5: J1.3@-876.39,-196.85 -852.91,-196.85 cw(c-852.91,-206.48) -846.11,-199.67 -803.78,-242 ccw(c-796.97,-235.19) -796.97,-244.82 -760.62,-244.82 P4.29@-760.25,-246.06 -632.9,-246.06 ccw(c-632.9,-236.44) -626.09,-243.24 v4(-619.03,-236.18)
CMOS_D3: J1.4 P4.28 U1.E1 U8.15 | length 1427.5
  Top Layer w5.5: U8.15@-218.5,-78.74 -197.07,-78.74 -183.11,-64.79 ; U1.E1@-137.8,-19.69 v1(-164.6,-19.53) -165.55,-20.49 -177.48,-32.41 ; -183.11,-64.79 ccw(c-189.92,-57.98) -180.29,-57.98 ; -183.11,-64.79 ccw(c-189.92,-57.98) -180.29,-57.98 ; -180.29,-57.98 -180.29,-39.21 ; -180.29,-39.21 cw(c-170.67,-39.21) -177.48,-32.41 ; -180.29,-39.21 cw(c-170.67,-39.21) -177.48,-32.41
  Mid-Layer 2 w5.5: v1(-630.75,-172.83) -630.75,-154.83 -658.53,-127.05 -658.53,-41.95 -650.45,-33.87 -639.82,-33.87 -635.7,-29.74 -635.7,-21.49 -639.82,-17.37 -652.45,-17.37 -656.58,-13.24 -656.58,-4.99 -652.45,-0.87 -620.55,-0.87 -616.42,3.26 -616.42,11.51 -620.55,15.63 -632.21,15.63 -637.51,20.92 -637.51,83.7 -599.86,121.35 -526.75,121.35 -497.76,150.34 -241.33,150.34 -214.49,123.49 -214.49,74.66 -187.97,48.14 -187.97,3.84 v1(-164.6,-19.53)
  Bottom Layer w5.5: J1.4@-876.39,-181.1 -847.84,-181.1 ; v1(-630.75,-172.83) -630.75,-195.8 cw(c-640.37,-195.8) -633.57,-202.61 -654.52,-223.56 cw(c-661.33,-216.76) -661.33,-226.38 P4.28@-760.25,-226.38 -760.47,-225.29 -795.68,-225.29 ; -847.84,-181.1 cw(c-847.84,-190.73) -841.03,-183.92 ; -847.84,-181.1 cw(c-847.84,-190.73) -841.03,-183.92 ; -841.03,-183.92 -802.48,-222.47 ; -802.48,-222.47 ccw(c-795.68,-215.66) -795.68,-225.29 ; -802.48,-222.47 ccw(c-795.68,-215.66) -795.68,-225.29
CMOS_D4: J1.5 P4.27 U1.F1 U8.16 | length 1398.4
  Top Layer w5.5: U8.16@-218.5,-110.24 -200.56,-110.24 -160.62,-70.29 ; v1(-157.27,-46.64) -157.8,-47.17 -157.8,-63.49 ; -160.62,-70.29 ccw(c-167.43,-63.49) -157.8,-63.49 ; -160.62,-70.29 ccw(c-167.43,-63.49) -157.8,-63.49
  Top Layer w6: v1(-157.27,-46.64) U1.F1@-137.8,-59.06
  Mid-Layer 2 w5.5: v1(-656.44,-193.71) -656.44,-154.6 -675.3,-135.74 -675.3,70.28 -608.66,136.93 -535.35,136.93 -507.88,164.4 -233.37,164.4 -200.36,131.4 -200.36,80.67 -173.46,53.77 -173.46,35.2 -137.09,-1.17 -137.09,-26.47 v1(-157.27,-46.64)
  Bottom Layer w5.5: J1.5@-876.39,-165.35 -843.94,-165.35 ; v1(-656.44,-193.71) -666.05,-203.32 cw(c-672.86,-196.52) -672.86,-206.14 -759.7,-206.14 P4.27@-760.25,-206.69 -760.86,-205.21 -796.11,-205.21 ; -843.94,-165.35 cw(c-843.94,-174.98) -837.13,-168.17 ; -843.94,-165.35 cw(c-843.94,-174.98) -837.13,-168.17 ; -837.13,-168.17 -802.91,-202.39 ; -802.91,-202.39 ccw(c-796.11,-195.59) -796.11,-205.21 ; -802.91,-202.39 ccw(c-796.11,-195.59) -796.11,-205.21
CMOS_D5: J1.6 P4.26 U1.F2 U8.17 | length 1484.2
  Top Layer w5.5: U8.17@-218.5,-141.73 -192.98,-141.73 -182.48,-131.23 ; U1.F2@-98.43,-59.06 v1(-118.11,-78.74) -145.1,-78.74 ; -182.48,-131.23 ccw(c-189.28,-124.42) -179.66,-124.42 ; -182.48,-131.23 ccw(c-189.28,-124.42) -179.66,-124.42 ; -179.66,-124.42 -179.66,-113.3 ; -179.66,-113.3 cw(c-170.03,-113.3) -176.84,-106.49 ; -179.66,-113.3 cw(c-170.03,-113.3) -176.84,-106.49 ; -176.84,-106.49 -151.91,-81.56 ; -151.91,-81.56 cw(c-145.1,-88.37) -145.1,-78.74 ; -151.91,-81.56 cw(c-145.1,-88.37) -145.1,-78.74
  Mid-Layer 2 w5.5: v1(-680.41,-171.71) -680.67,-171.71 -680.67,-156.65 -689.96,-147.36 -689.96,76.51 -614.99,151.48 -542.75,151.48 -516.49,177.75 -227.62,177.75 -186.72,136.85 -186.72,86.07 -160.26,59.61 -160.26,41.81 -109.58,-8.87 -109.58,-70.21 v1(-118.11,-78.74)
  Bottom Layer w5.5: J1.6@-876.39,-149.61 -841.46,-149.61 ; v1(-680.41,-171.71) -692.11,-183.4 cw(c-698.91,-176.59) -698.91,-186.22 -759.46,-186.22 P4.26@-760.25,-187.01 -796.08,-187.01 ; -841.46,-149.61 cw(c-841.46,-159.23) -834.65,-152.43 ; -841.46,-149.61 cw(c-841.46,-159.23) -834.65,-152.43 ; -834.65,-152.43 -802.89,-184.19 ; -802.89,-184.19 ccw(c-796.08,-177.39) -796.08,-187.01 ; -802.89,-184.19 ccw(c-796.08,-177.39) -796.08,-187.01
CMOS_D6: J1.7 P4.25 U1.G1 U8.18 | length 1433.1
  Top Layer w5.5: U8.18@-218.5,-173.23 -195.33,-173.23 -166.67,-144.57 ; U1.G1@-137.8,-98.43 U1.G1@-137.8,-98.43 v1(-157.16,-117.7) -163.85,-124.39 -163.85,-125.06 -163.85,-137.76 ; -166.67,-144.57 ccw(c-173.47,-137.76) -163.85,-137.76 ; -166.67,-144.57 ccw(c-173.47,-137.76) -163.85,-137.76
  Mid-Layer 2 w5.5: v1(-614.43,-123.85) -601.78,-111.2 -601.78,-103.62 -560.92,-62.76 -560.92,-37.29 -556.79,-33.16 -536.55,-33.16 -532.42,-29.04 -532.42,-20.79 -536.55,-16.66 -554.64,-16.66 -558.77,-12.54 -558.77,-4.29 -554.64,-0.16 -535.91,-0.16 -531.78,3.96 -531.78,12.21 -535.91,16.34 -564.04,16.34 -568.17,20.46 -568.17,28.71 -564.04,32.84 -535.91,32.84 -531.78,36.96 -531.78,45.21 -535.91,49.34 -564.04,49.34 -568.17,53.46 -568.17,61.71 -564.04,65.84 -537.33,65.84 -480.72,122.44 -256.54,122.44 -242.91,108.81 -242.91,63.58 -216.88,37.56 -216.88,-72.86 -172.04,-117.7 v1(-157.16,-117.7)
  Bottom Layer w5.5: J1.7@-876.39,-133.86 -837.27,-133.86 ; v1(-614.43,-123.85) -661.9,-123.85 ccw(c-661.9,-133.47) -668.7,-126.67 -705.71,-163.68 cw(c-712.52,-156.87) -712.52,-166.5 -759.43,-166.5 P4.25@-760.25,-167.32 -761.57,-167.78 -795.38,-167.78 ; -837.27,-133.86 cw(c-837.27,-143.48) -830.46,-136.68 ; -837.27,-133.86 cw(c-837.27,-143.48) -830.46,-136.68 ; -830.46,-136.68 -802.18,-164.96 ; -802.18,-164.96 ccw(c-795.38,-158.15) -795.38,-167.78 ; -802.18,-164.96 ccw(c-795.38,-158.15) -795.38,-167.78
CMOS_D7: J1.8 P4.24 U1.H1 U8.19 | length 1424.2
  Top Layer w5.5: U8.19@-173.23,-218.5 -173.23,-177.1 ; v1(-118.39,-118.92) -137.27,-137.8 U1.H1@-137.8,-137.8 -137.91,-137.8 -170.41,-170.3 ; -173.23,-177.1 cw(c-163.6,-177.1) -170.41,-170.3 ; -173.23,-177.1 cw(c-163.6,-177.1) -170.41,-170.3
  Mid-Layer 2 w5.5: v1(-629.5,-96.57) -629.5,-68.1 -621.98,-60.58 -586.75,-60.58 -582.62,-56.45 -582.62,-48.2 -586.75,-44.08 -613.13,-44.08 -617.25,-39.95 -617.25,-31.7 -613.13,-27.58 -583.02,-27.58 -578.89,-23.45 -578.89,-15.2 -583.02,-11.08 -596.19,-11.08 -600.31,-6.95 -600.31,85.82 -579.68,106.45 -519.64,106.45 -490.05,136.05 -248.74,136.05 -228.46,115.77 -228.46,69.16 -202.52,43.23 -202.52,-63.16 -173.05,-92.63 -145.34,-92.63 -119.06,-118.92 v1(-118.39,-118.92)
  Bottom Layer w5.5: J1.8@-876.39,-118.11 -833.3,-118.11 ; v1(-629.5,-96.57) -640.44,-107.51 -665.69,-107.51 ccw(c-665.69,-117.13) -672.5,-110.32 -706.44,-144.27 cw(c-713.25,-137.46) -713.25,-147.09 -759.69,-147.09 P4.24@-760.25,-147.64 -761.52,-145.5 -797.94,-145.5 ; -833.3,-118.11 cw(c-833.3,-127.74) -826.49,-120.93 ; -833.3,-118.11 cw(c-833.3,-127.74) -826.49,-120.93 ; -826.49,-120.93 -804.74,-142.68 ; -804.74,-142.68 ccw(c-797.94,-135.87) -797.94,-145.5 ; -804.74,-142.68 ccw(c-797.94,-135.87) -797.94,-145.5
CMOS_HD: J1.13 P4.19 U1.H2 U8.20 | length 1348.4
  Top Layer w5.5: U8.20@-141.73,-218.5 -141.73,-185.81 cw(c-132.11,-185.81) -138.91,-179 v1(-120.9,-160.99)
  Top Layer w6: v1(-120.9,-160.99) U1.H2@-98.43,-137.8
  Mid-Layer 2 w5.5: v1(-549.57,-156.22) -530.5,-156.22 -526.37,-152.09 -526.37,-140.43 -522.25,-136.31 -514,-136.31 -509.87,-140.43 -509.87,-164.92 -505.75,-169.04 -497.5,-169.04 -493.37,-164.92 -493.37,-140.43 -489.25,-136.31 -481,-136.31 -476.87,-140.43 -476.87,-164.92 -472.75,-169.04 -464.5,-169.04 -460.37,-164.92 -460.37,-140.43 -456.25,-136.31 -448,-136.31 -443.87,-140.43 -443.87,-164.92 -439.75,-169.04 -431.5,-169.04 -427.37,-164.92 -427.37,-140.43 -423.25,-136.31 -415,-136.31 -410.87,-140.43 -410.87,-164.92 -406.75,-169.04 -398.5,-169.04 -394.37,-164.92 -394.37,-140.43 -390.25,-136.31 -382,-136.31 -377.87,-140.43 -377.87,-164.92 -373.75,-169.04 -365.5,-169.04 -361.37,-164.92 -361.37,-120.38 -357.25,-116.26 -349,-116.26 -344.87,-120.38 -344.87,-164.92 -340.75,-169.04 -332.5,-169.04 -328.37,-164.92 -328.37,-120.38 -324.25,-116.26 -235.75,-116.26 -191.01,-160.99 v1(-120.9,-160.99)
  Bottom Layer w5.5: J1.13@-876.39,-39.37 -806.32,-39.37 cw(c-806.32,-48.99) -799.52,-42.19 -796.08,-45.63 ccw(c-789.27,-38.82) -789.27,-48.44 -760.35,-48.44 P4.19@-760.25,-49.21 -627.73,-49.21 cw(c-627.73,-58.83) -620.92,-52.03 -552.39,-120.57 cw(c-559.19,-127.37) -549.57,-127.37 v1(-549.57,-156.22)